# Altium PCB board_pcb.PcbDoc
Units mm, origin at the board's own origin, x right, y up, seen from the top; angles counter-clockwise.
Board outline 31.24 x 49.66 mm, 2 copper layers (Top Layer, Bottom Layer); 18 components, 22 nets, 76 pads, 18 vias.
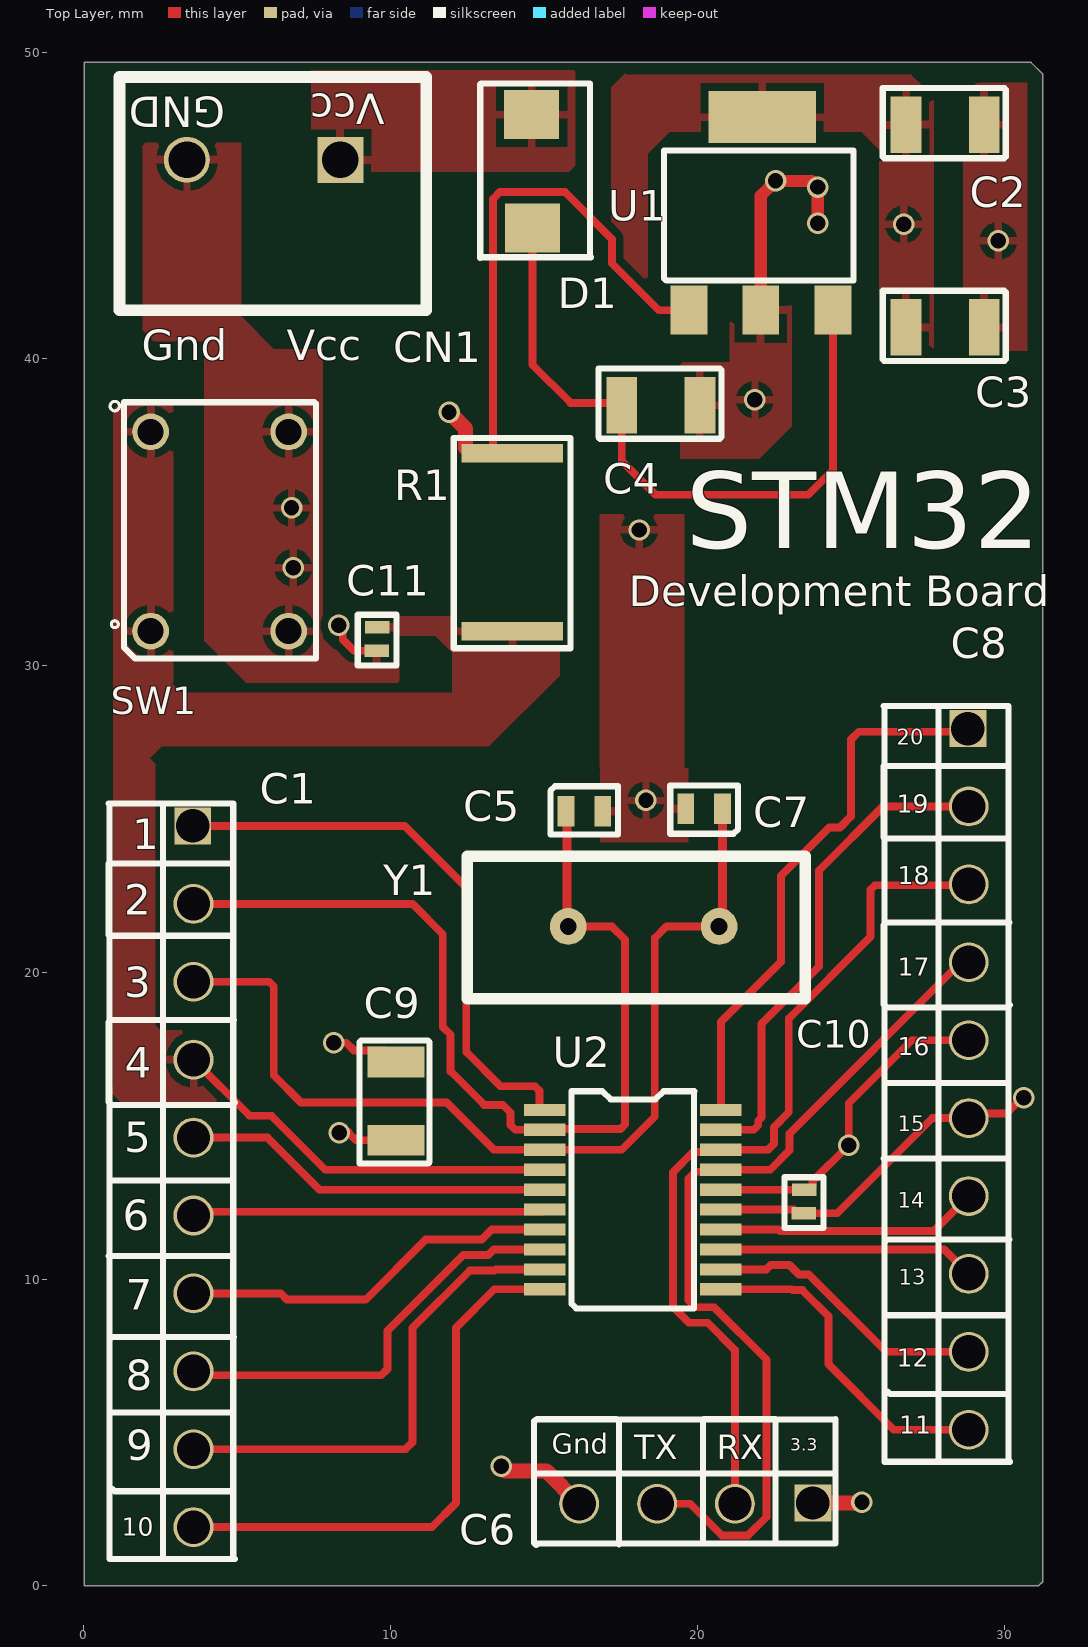
[diagram p0: Top Layer view]
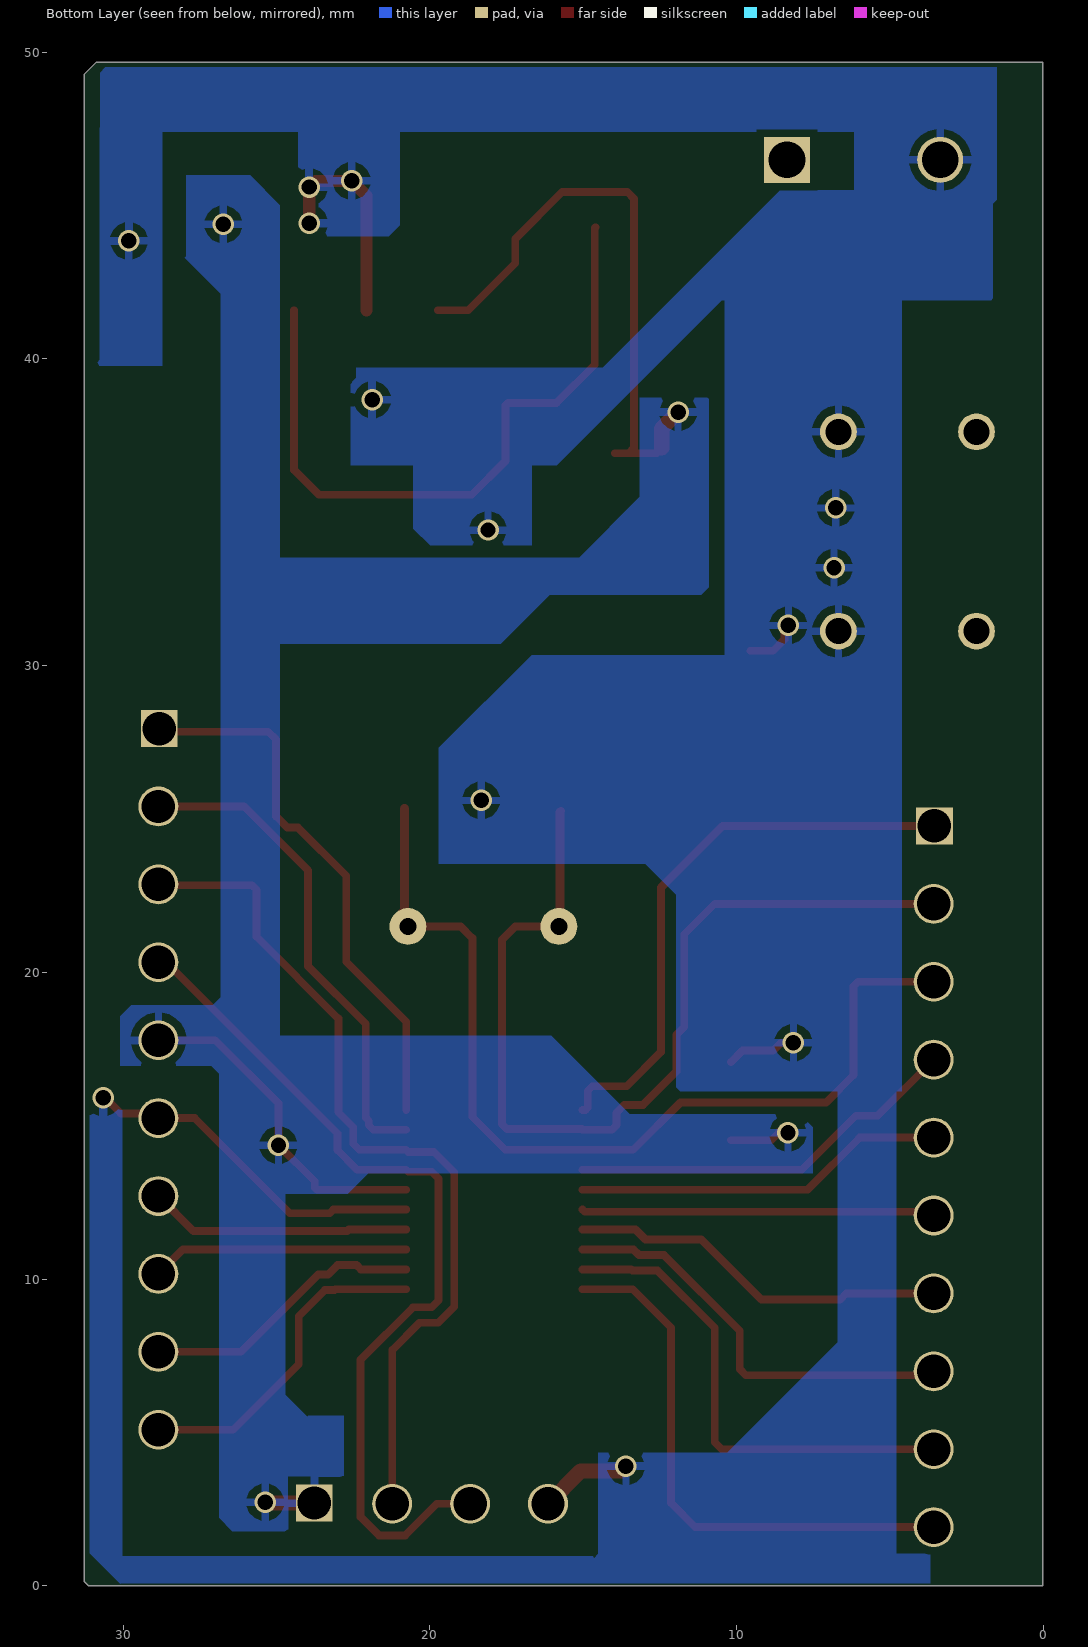
[diagram p1: Bottom Layer view, seen from below]

## Layer stack, top to bottom
Top Solder: solder mask 0.0102, Solder Resist, Dk 3.5
Top Layer: signal copper 0.0356
Dielectric 1: dielectric 0.32, FR-4, Dk 4.8
Bottom Layer: signal copper 0.0356
Bottom Solder: solder mask 0.0102, Solder Resist, Dk 3.5

## Board outline
0.019,0.011 0.019,49.668 30.88,49.668 31.261,49.287 31.261,0.138 31.134,0.011

## Design rules (kind name [scope] priority, off if disabled: settings)
Clearance [All] p1: gap=0.1 ignorepadtopadclearanceinfootprint=FALSE
PolygonConnect [All] p1: connectstyle=Relief reliefconductorwidth=0.254 reliefentries=4 polygonreliefangle="90 Angle" airgapwidth=0.254
RoutingVias [All] p1: holewidth=0.711 width=1.27 viastyle="Through Hole" minholewidth=0.711 minwidth=1.27 maxholewidth=0.711 maxwidth=1.27
SolderMaskExpansion [All] p1: expansion=0.102 istentingtop=FALSE
Width [All] p1: maxlimit=0.5 minlimit=0.254 preferedwidth=0.3
30 further rules are at their usual default settings.

## Classes and differential pairs
component class board_schematic: C1 C2 C3 C4 C5 C7 C8 C9 C10 C11 CN1 D1 R1 SW1 U1 U2 Y1

## Components (designator, comment, footprint, x,y, rotation, side; value= is the part's Value field where it differs from the comment)
C1 "PIN HEADER 10 PINS MALE" "PIN HEADER 10 PINS MALE" 3.575,24.776 r0 top
C2 "10uF" "CAP 220nF SMD" 26.806,47.636 r0 top
C3 "10uF" "CAP 220nF SMD" 26.806,41.032 r0 top
C4 "10uF" "CAP 220nF SMD" 17.535,38.492 r0 top
C5 "15pF" "CAP 15pF SMD" 15.716,25.259 r0 top
C6 "PIN HEADER 4 PINS MALE" "PIN HEADER 4 PINS MALE" 23.768,2.678 r270 top
C7 "15pF" "CAP 15pF SMD" 20.822,25.335 r180 top
C8 "PIN HEADER 10 PINS MALE" "PIN HEADER 10 PINS MALE" 28.848,27.951 r0 top
C9 "10nF" "CAP 220nF SMD" 10.179,14.53 r90 top
C10 "100nF" "CAP 100nF SMD" 23.482,12.94 r270 top
C11 "100nF" "CAP 100nF SMD" 9.563,31.279 r270 top
CN1 "Terminal_Block" TerminalBlock_2pins 5.861,46.493 r180 top
D1 "Diode 1N4004" "Diode 1N4004" 14.624,47.966 r270 top
R1 "1K" "RES 10K SMD" 13.964,36.917 r270 top
SW1 "Mini Push Button 4 Pin" "Mini Push Button 4 Pin" 2.178,37.626 r90 top
U1 "LM1117" LM1117 22.015,41.591 r0 top
U2 "STM32F030F4" STM32F030F4P6TR 15.021,15.519 r0 top
Y1 "8MHz" "Crystal 8MHz" 18.252,21.499 r0 top

## Footprints (in the part's own frame and the unit in brackets; to place one, negate y for a bottom-side part, rotate by r counter-clockwise, add the part's x,y. Pads: shape width x height; smd on the part's side, far side on the other; paste and mask are expansions set on the pad)
"CAP 15pF SMD" [mm] "50V 15pF C0G ±5% 0603 Multilayer Ceramic Capacitors MLCC – SMD/SMT ROHS"
  rect 0.55x1 smd: 1(0,0) 2(1.2,0)
  silkscreen extent -0.51,-0.76 1.7,0.81, body extent -0.22,-0.43 1.38,0.37, height 0.8
"CAP 100nF SMD" [mm] "16V 100nF X7R ±10% 0402 Multilayer Ceramic Capacitors MLCC – SMD/SMT ROHS"
  rect 0.4x0.8 smd: 1(0.025,0) 2(0.788,-0.019)
  silkscreen extent -0.38,-0.64 1.27,0.64, body extent -0.12,-0.25 0.88,0.25, height 0.5
"CAP 220nF SMD" [mm] "Multilayer Ceramic Capacitors MLCC – SMD/SMT 220nF ±10 50V 1206"
  rect 1x1.85 smd: 1(0,0) 2(2.55,0)
  silkscreen extent -0.76,-1.09 3.25,1.19, body extent -0.42,-0.83 2.86,0.77, height 1.2
"Crystal 8MHz" [mm]
  round 1.2 hole 0.55: 1(-2.46,0) 2(2.46,0)
  silkscreen extent -5.75,-2.36 5.27,2.29, body extent -5.68,-2.32 5.68,2.32, height 4.6
"Diode 1N4004" [mm] "Single 1A 1.1V@1A 400V SMA Diodes – General Purpose ROHS"
  rect 1.6x1.8 smd: 1(0,-0.025) 2(3.7,0)
  silkscreen extent -1.02,-1.7 4.67,1.91, body extent -0.82,-1.55 4.48,1.55, height 2.45
LM1117 [mm] "3.3 SOT-233 Linear Voltage Regulators (LDO) 3.3V  Output Current 800mA"
  rect 1.2x1.6 smd: 1(2.413,0) 2(0.051,0) 3(-2.286,0)
  rect 3.5x1.7 smd: 3(0.102,6.299)
  silkscreen extent -3.1,0.97 3.07,5.21, body extent -3.25,-0.6 3.45,6.7, height 1.75
"Mini Push Button 4 Pin" [mm]
  round 1.2 hole 0.85: 1(-6.5,0) 1(0,0) 2(-6.5,-4.5) 2(0,-4.5)
  silkscreen extent -7.39,-5.38 0.99,1.32, body extent -6.5,-5.14 0.1,0.86, height 9.5
"PIN HEADER 4 PINS MALE" [mm] "Through Hole 1way 4pins"
  rect 1.2x1.2 hole 1.09: 1(-0.025,0)
  round 1.3 hole 1.09: 2(0,-2.54) 3(0,-5.08) 4(0,-7.62)
  silkscreen extent -2.77,-9.09 1.35,0.74, body extent -1.27,-8.89 1.24,1.27, height 8.54
"PIN HEADER 10 PINS MALE" [mm] "Through Hole 1way 10pins"
  rect 1.2x1.2 hole 1.09: 1(-0.025,0)
  round 1.3 hole 1.09: 2(0,-2.54) 3(0,-5.08) 4(0,-7.62) 5(0,-10.16) 6(0,-12.7) 7(0,-15.24) 8(0,-17.78) 9(0,-20.32) 10(0,-22.86)
  silkscreen extent -2.77,-23.9 1.35,0.74, body extent -1.27,-24.13 1.24,1.27, height 8.54
"RES 10K SMD" [mm] "FRC2512J103 TS    SMD 10K? ±5% 1W ±100ppm/? 2512"
  rect 0.6x3.3 smd: 1(-0.01,0) 2(5.8,0)
  silkscreen extent -0.51,-1.91 6.35,1.91, body extent -0.23,-1.55 6.07,1.55, height 0.6
STM32F030F4P6TR [mm] "16KB 2.4V~3.6V CM0 4KB 48MHz FLASH 15 TSSOP-20 Microcontroller Units (MCUs/MPUs/SOCs) ROHSGGGQQQ"
  rect 1.35x0.4 smd: 1(0,0) 2(0,-0.65) 3(0,-1.3) 4(0,-1.95) 5(0,-2.6) 6(0,-3.25) 7(0,-3.9) 8(0,-4.55) 9(0,-5.2) 10(0,-5.85) 11(5.75,-5.85) 12(5.75,-5.2) 13(5.75,-4.55) 14(5.75,-3.9) 15(5.75,-3.25) 16(5.75,-2.6) 17(5.75,-1.95) 18(5.75,-1.3) 19(5.75,-0.65) 20(5.75,0)
  silkscreen extent 0.88,-6.47 4.88,0.61, body extent -0.19,-6.25 6.09,0.25, height 1.1
TerminalBlock_2pins [mm]
  rect 1.5x1.5 hole 1.2: 1(-2.5,0)
  round 1.5 hole 1.2: 2(2.5,0)
  silkscreen extent -5.3,-2.7 4.7,4.9, body extent -5.5,-2.6 5,5, height 11

## Part data
C1 C8: "Through Hole 1way 10pins", Manufacturer=ZHOURI, Manufacturer part number=2.54-1*10, Supplier Part Number=34963000697510, Supplier="Makers electronics"
C2 C3 C4: library part "CAP 10uF SMD", "25V 10uF Y5V ±10% 1206 Multilayer Ceramic Capacitors MLCC – SMD/SMT ROHS", Manufacturer=CCTC, Manufacturer part number=TCC1206X5R106K250HT, Supplier Part Number=2168949689378, Supplier="Makers electronics"
C5 C7: library part "CAP 15pF SMD", "50V 15pF C0G ±5% 0603 Multilayer Ceramic Capacitors MLCC – SMD/SMT ROHS– SMD/SMT ROHS", Manufacturer=CCTC, Manufacturer part number=TCC0603COG150J500CT, Supplier Part Number=4797906887618, Supplier="Makers electronics"
C6: "Through Hole 1way 4pins", Manufacturer=ZHOURI, Manufacturer part number=2.54-1*4, Supplier Part Number=34963000697510, Supplier="Makers electronics"
C9: library part "CAP 10nF SMD", "50V 10nF X7R ±10% 1206 Multilayer Ceramic Capacitors MLCC – SMD/SMT ROHS", Manufacturer=CCTC, Manufacturer part number=TCC1206X7R103K500DT, Supplier Part Number=34963000814010, Supplier="Makers electronics"
C10 C11: library part "CAP 100nF SMD", "16V 100nF X7R ±10% 0402 Multilayer Ceramic Capacitors MLCC – SMD/SMT ROHS", Manufacturer="Samsung Electro-Mechanics", Manufacturer part number=CL05B104KO5NNNC, Supplier Part Number=7283127875093, Supplier="Makers electronics"
CN1: Manufacturer="CUI Devices", Manufacturer part number=TB002-500-02BE, Supplier Part Number=1215363384929, Supplier="Makers Electronics"
D1: "Single 1A 1.1V@1A 400V SMA Diodes – General Purpose ROHS", Manufacturer=YONGYUTAI, Manufacturer part number=1N4004, Supplier Part Number=3496300071791, Supplier="Makers electronics"
R1: library part "RES 1K SMD", "Chip Resistor SMD 1KΩ ±5% 1W ±100ppm/℃ 2512", Manufacturer=FOJAN, Manufacturer part number="FRC2512J103 TS", Supplier Part Number=3496300080755, Supplier="Makers electronics"
SW1: "6x6x7mm Tactile 4 Pin Push Button Switch", anufacturer part number=1TS005F-2500-5001, Manufacturer="HYP (Hongyuan Precision)", Supplier Part Number=3496300083299, Supplier="Makers electronics"
U1: "3.3 SOT-233 Linear Voltage Regulators (LDO) 3.3V  Output Current 800mA", Manufacturer="National semiconductors", Supplier Part Number=34963000647010, manufactuerer part number=LM1117, Supplier="Makers electronics"
U2: ". TSSOP20 20-pin package pinout", Manufacturer=STMicroelectronics, Manufacturer part number=STM32F030F4P6TR, Supplier Part Number=C89040, Supplier="LCSC ELECTRONICS"
Y1: library part "Crystal 8.000MHz", "Crystal 8.000MHz 49S 20PPM 20pF 40Ω", Manufacturer="HUIYUAN Crystal", Manufacturer part number=HY8M49SOB2T02, Supplier Part Number=7006618269054, Supplier="Makers Electronics"

## Via types
v1: diameter 0.7, hole 0.5, Top Layer to Bottom Layer, 18 vias

## Nets (pads, with @x,y where several pads share a name; then routed paths per layer and width w, separated by ;. In a path a pad name is that pad's centre, name@x,y a point inside that pad or via, vN(x,y) a via of type N, cw(c..) or ccw(c..) an arc to the next point about the centre after c; other vN are vias at no path point)
+3.3v: C2.1 C3.1 C6.1 C8.5 C9.1 C10.1 R1.1 U1.3 U2.16 | length 34.2
  Top Layer w0.254: v1@8.624,14.794 8.624,14.779 8.873,14.53 C9.1 ; R1.1@12.441,37.1 12.614,36.927 R1.1@13.516,36.927 ; R1.1 R1.1@13.516,36.927 ; U1.3@19.729,41.591 18.748,41.591 17.215,43.124 17.215,43.914 15.682,45.447 13.566,45.447 13.343,45.224 13.343,37.1 R1.1@13.516,36.927 ; U2.16 20.773,12.917 23.48,12.917 C10.1 23.682,12.915 23.755,12.988 23.755,13.188 v1(24.936,14.369) 24.936,15.734 26.994,17.791 C8.5 ; v1@25.343,2.703 v1(25.368,2.729)
  Top Layer w0.5: v1(11.906,38.263) 12.441,37.729 R1.1@12.441,37.1 ; C6.1 v1@25.343,2.703
  other v1: 8.325,14.768 26.731,44.39
GND: C2.2 C3.2 C4.2 C5.2 C6.4 C7.2 C8.6 C9.2 C10.2 C11.2 CN1.2 SW1.2 U1.2 U2.15 | length 25.2
  Top Layer w0.254: v1(8.147,17.709) 8.551,17.709 8.808,17.453 9.806,17.453 C9.2 ; v1@8.441,31.146 8.441,30.855 8.805,30.491 C11.2 ; U2.15 23.147,12.269 23.263,12.152 C10.2 24.565,12.152 27.663,15.251 C8.6 ; C8.6@29.001,15.404 30.08,15.404 v1@30.59,15.914
  Top Layer w0.4: U1.2 22.066,45.322 v1(22.55,45.806) 23.728,45.806 v1(23.928,45.606) v1(23.928,44.427)
  Top Layer w0.5: v1@13.735,3.745 15.081,3.745 C6.4 ; C8.6 C8.6@29.001,15.404 ; v1@30.59,15.914 v1(30.644,15.914)
  other v1: 13.608,3.897 18.326,25.609 8.31,31.314 6.823,33.198 18.103,34.424 6.771,35.145 21.878,38.67 29.813,43.851
NetC1_1: C1.1 U2.1 | length 18.8
  Top Layer w0.254: C1.1 10.458,24.776 12.465,22.769 12.465,17.41 13.583,16.292 14.704,16.292 14.853,16.144 14.853,15.592 14.926,15.519 U2.1
NetC1_2: C1.2 C5.1 U2.2 Y1.1 | length 31.8
  Top Layer w0.254: C1.2 10.712,22.236 11.703,21.245 11.703,18.223 11.957,17.969 11.957,16.775 13.049,15.683 13.659,15.683 13.913,15.429 13.913,15.019 14.062,14.87 15.022,14.87 15.047,14.895 17.494,14.895 17.647,15.048 17.647,21.068 17.215,21.499 Y1.1 Y1.1@15.754,21.538 ; C5.1 C5.1@15.754,25.221
  Top Layer w0.3: Y1.1@15.754,21.538 C5.1@15.754,25.221
NetC1_3: C1.3 C7.1 U2.3 Y1.2 | length 31.4
  Top Layer w0.254: C1.3 6.042,19.696 6.191,19.547 6.191,16.648 7.08,15.759 11.83,15.759 13.37,14.219 U2.3 17.536,14.219 18.612,15.295 18.612,21.118 18.993,21.499 Y1.2
  Top Layer w0.3: Y1.2@20.822,21.891 C7.1
  Top Layer w0.5: Y1.2@20.789,21.576 20.789,21.859 Y1.2@20.822,21.891
  Top Layer w0.8: Y1.2 Y1.2@20.789,21.576
NetC1_4: C1.4 C11.1 R1.2 SW1.1 U2.4 | length 12.9
  Top Layer w0.254: C1.4 5.404,15.327 6.115,15.327 7.873,13.569 U2.4
NetC1_5: C1.5 U2.5 | length 12.1
  Top Layer w0.254: C1.5 5.988,14.616 7.685,12.919 U2.5
NetC1_6: C1.6 U2.6 | length 11.5
  Top Layer w0.254: C1.6 3.699,12.2 14.952,12.2 U2.6
NetC1_7: C1.7 U2.7 | length 12.5
  Top Layer w0.254: C1.7 6.422,9.536 6.625,9.333 9.188,9.333 11.15,11.294 12.971,11.294 13.296,11.619 U2.7
NetC1_8: C1.8 U2.8 | length 13.9
  Top Layer w0.254: C1.8 3.702,6.869 9.696,6.869 9.9,7.072 9.9,8.317 12.369,10.786 13.181,10.786 13.364,10.969 U2.8
NetC1_9: C1.9 U2.9 | length 16.1
  Top Layer w0.254: C1.9 10.484,4.456 10.712,4.685 10.712,8.411 12.579,10.278 13.392,10.278 13.432,10.319 U2.9
NetC1_10: C1.10 U2.10 | length 18
  Top Layer w0.254: C1.10 11.347,1.916 12.135,2.703 12.135,8.418 13.385,9.669 U2.10
NetC4_1: C4.1 D1.2 U1.1 | length 22.7
  Top Layer w0.254: D1.2@14.599,44.292 D1.2 14.624,39.813 15.869,38.568 17.459,38.568 C4.1 17.535,36.673 18.637,35.571 23.616,35.571 24.428,36.384 U1.1
NetC6_2: C6.2 C8.3 U2.18 | length 28.5
  Top Layer w0.254: C6.2 21.228,7.687 20.335,8.58 19.728,8.58 19.207,9.101 19.207,13.487 19.87,14.15 20.702,14.15 U2.18 22.304,14.219 22.498,14.413 22.498,14.956 22.981,15.439 22.981,18.495 25.648,21.162 25.648,22.697 25.796,22.846 28.823,22.846 C8.3
NetC6_3: C6.3 C8.4 U2.17 | length 29.1
  Top Layer w0.254: C6.3 19.77,2.678 20.801,1.647 21.655,1.647 22.259,2.251 22.259,7.375 20.546,9.088 19.938,9.088 19.715,9.311 19.715,11.977 19.715,13.277 19.938,13.5 20.702,13.5 U2.17 22.372,13.569 23.006,14.202 23.006,14.746 28.591,20.331 C8.4
NetC8_1: C8.1 U2.20 | length 18
  Top Layer w0.254: U2.20 20.771,18.393 22.727,20.349 22.727,23.15 24.301,24.725 24.65,24.725 25.013,25.088 25.013,27.595 25.267,27.849 28.721,27.849 C8.1
NetC8_2: C8.2 U2.19 | length 16.2
  Top Layer w0.254: U2.19 21.841,14.869 21.99,15.018 21.99,15.167 22.092,15.269 22.092,18.324 23.971,20.204 23.971,23.328 26.054,25.411 C8.2
NetC8_7: C8.7 U2.14 | length 8.6
  Top Layer w0.254: U2.14 22.646,11.619 22.694,11.571 27.708,11.571 C8.7
NetC8_8: C8.8 U2.13 | length 8.4
  Top Layer w0.254: U2.13 28.05,10.969 C8.8
NetC8_9: C8.9 U2.12 | length 9.3
  Top Layer w0.254: U2.12 22.251,10.319 22.393,10.461 23.007,10.461 23.317,10.151 23.635,10.151 26.156,7.631 C8.9
NetC8_10: C8.10 U2.11 | length 10.9
  Top Layer w0.254: U2.11 23.081,9.669 23.106,9.643 23.425,9.643 24.276,8.792 24.276,7.225 26.41,5.091 C8.10
VCC: CN1.1 D1.1

## Polygon pours and split planes (outlines as drawn)
GND on Top Layer "GND_L01_P030" (solid, pour order 30): 16.844,26.656 16.818,26.682 16.818,34.93 19.58,34.93 19.58,34.416 19.58,26.299 16.818,26.299
+3.3v on Top Layer "+3.3V_L01_P005" (solid, pour order 5): 20.187,40.803 18.307,40.803 17.189,41.921 17.189,48.855 17.647,49.312 17.697,49.262 26.994,49.262 26.994,49.236 27.705,48.525 27.705,40.27 27.476,40.041 26.079,40.041 25.775,40.346 25.927,40.499 25.927,46.823 25.343,47.407 19.094,47.407 18.383,46.696 18.383,42.505 18.637,42.251 20.237,42.251 20.237,40.778
GND on Top Layer "GND_L01_P000" (solid, pour order 0): 1.899,47.153 2,47.052 5.124,47.052 5.124,41.388 6.191,40.321 7.791,40.321 7.791,30.897 8.147,30.542 10.281,30.542 10.281,29.577 10.331,29.526 10.255,29.45 5.302,29.45 3.931,30.821 3.931,40.575 2.28,40.575 1.924,40.93 1.924,47.103
GND on Top Layer "GND_L01_P001" (solid, pour order 1): 21.33,41.743 23.082,41.743 23.082,37.806 22.015,36.739 19.45,36.739 19.45,39.813 19.526,39.889 21.05,39.889 21.05,41.261 21.558,41.769
GND on Top Layer "GND_L01_P002" (solid, pour order 2): 29.204,49.008 30.753,49.008 30.753,40.27 29.421,40.27 28.67,40.27 28.67,48.627 29.026,48.982 29.254,48.982
VCC on Top Layer "VCC_L01_P019" (solid, pour order 19): 7.41,49.414 7.41,46.112 15.818,46.112 16.021,46.315 16.021,49.363 15.97,49.414 7.36,49.414
NetC1_4 on Top Layer "NETC1_4_L01_P012" (solid, pour order 12): 15.488,31.609 9.493,31.609 9.011,31.126 9.163,30.974 11.449,30.974 12.008,30.415 12.008,29.119 3.169,29.119 2.864,29.424 2.915,29.475 2.915,38.594 2.838,38.67 1.264,38.67 0.959,38.365 0.959,16.267 0.832,16.14 1.238,15.734 4.566,15.734 4.566,18.045 4.642,18.121 2.483,18.121 2.33,18.274 2.33,26.808 2.153,26.986 2.534,27.367 13.202,27.367 15.513,29.678 15.513,31.634
GND on Top Layer "s" (solid, pour order 6): 16.808,26.656 16.834,26.63 16.834,24.243 19.501,24.243 19.704,24.243 19.704,26.579 19.704,26.656
GND on Bottom Layer "GND_L02_P031" (solid, pour order 31): 16.705,36.974 16.681,36.95 16.681,33.924 19.993,33.924 20.541,34.472 20.541,36.927 16.871,36.927 16.8,36.998
+3.3v on Bottom Layer "+3.3V_L02_P022" (solid, pour order 22): 22.803,5.853 22.803,1.789 26.435,1.789 26.867,2.221 26.867,16.699 27.121,16.953 30.093,16.953 30.093,18.578 29.737,18.934 27.07,18.934 26.816,19.188 26.816,42.124 27.984,43.293 27.934,43.343 27.934,45.985 25.851,45.985 24.886,45.02 24.886,17.943 16.046,17.943 13.481,15.378 7.944,15.378 7.512,14.946 7.512,13.448 22.015,13.448 22.676,12.787 24.708,12.787 24.708,6.234 23.997,5.523 23.971,5.548 22.727,5.548 22.727,5.574 22.777,5.624
GND on Bottom Layer "GND_L02_P018" (solid, pour order 18): 22.523,39.229 22.574,39.178 22.574,36.536 15.866,36.536 10.481,41.921 1.695,41.921 1.645,41.972 1.645,45.401 1.746,45.502 8.579,45.502 14.37,39.711 22.396,39.711 22.396,39.381 22.523,39.254
GND on Bottom Layer "GND_L02_P021" (solid, pour order 21): 29.331,43.293 30.753,43.293 30.753,49.338 30.575,49.516 1.518,49.516 1.518,45.198 3.219,43.496 5.15,43.496 6.166,44.512 6.166,47.407 28.975,47.407 29.381,47.001 29.381,43.394
GND on Bottom Layer "GND_L02_P029" (solid, pour order 29): 24.517,48.077 24.291,47.851 24.291,43.996 21.344,43.996 20.981,44.359 20.981,48.055 20.891,48.145
GND on Bottom Layer "GND_L02_P028" (solid, pour order 28): 28.482,47.686 28.719,47.449 28.719,39.78 30.944,39.78 30.754,39.97 30.754,47.544 30.612,47.686
GND on Bottom Layer "GND_L02_P027" (solid, pour order 27): 4.723,16.885 4.829,16.991 6.706,16.991 6.706,7.945 10.303,4.348 14.509,4.348 14.509,1.041 14.641,0.909 14.694,0.962 30.035,0.962 30.035,16.33 30.22,16.515 30.273,16.462 31.092,16.462 31.092,1.068 30.087,0.063 30.06,0.09 3.678,0.09 3.678,0.501 3.678,1.055 4.787,1.055 4.787,16.893 4.903,17.009
GND on Bottom Layer "GND_L02_P025" (solid, pour order 25): 4.524,42.309 10.378,42.309 10.378,40.964 10.378,30.349 16.68,30.349 19.705,27.324 19.705,23.543 12.983,23.543 11.974,22.534 11.974,16.26 11.834,16.12 4.608,16.12 4.608,42.128 4.535,42.201
+3.3v on Bottom Layer "+3.3V_L02_P023" (solid, pour order 23): 10.949,38.736 13.149,38.736 13.149,35.502 15.125,33.526 25.5,33.526 25.5,31.213 25.006,30.719 17.685,30.719 16.091,32.313 11.151,32.313 10.904,32.56 10.904,38.758

## Silkscreen, mask and mechanical layers (free items; w line width, h text height)
Top Overlay:
  text "Gnd" at 1.895,39.962 h1
  text "Vcc" at 6.62,39.962 h1
  text "STM32" at 19.62,33.836 h2.5
  text "Development Board" at 17.772,31.94 h1
  text "20" at 26.51,27.416 h0.5
  text "19" at 26.51,25.206 h0.6
  text "1" at 1.577,24.02 h1
  text "18" at 26.535,22.869 h0.6
  text "2" at 1.311,21.877 h1
  text "17" at 26.535,19.898 h0.6
  text "3" at 1.311,19.185 h1
  text "16" at 26.535,17.307 h0.6
  text "4" at 1.337,16.569 h1
  text "15" at 26.535,14.818 h0.5
  text "5" at 1.311,14.13 h1
  text "14" at 26.535,12.328 h0.5
  text "6" at 1.26,11.59 h1
  text "13" at 26.56,9.813 h0.5
  text "7" at 1.362,8.999 h1
  text "12" at 26.51,7.147 h0.6
  text "8" at 1.362,6.383 h1
  text "11" at 26.586,4.962 h0.6
  text "3.3" at 23.03,4.404 h0.4
  text "Gnd" at 15.257,4.301 h0.65
  text "TX" at 17.948,4.123 h0.8
  text "RX" at 20.641,4.123 h0.8
  text "9" at 1.387,4.097 h1
  text "10" at 1.237,1.635 h0.6
Mechanical 1:
  the board outline again, w0.2

## Text inside footprints (layer, text, board x,y; h text height)
CN1: Top Overlay "Vcc" at 9.811,48.643 h1 r180; Top Overlay "GND" at 4.611,48.543 h1 r180